# EAGLE board TramontaEmanueleCircuito (EAGLE 9.7.0)

Size 159.7 x 119.8 mm. Coordinates in mm from the lower left corner, seen from the top.
Outline: 0,0 159.7,0 159.7,119.8 0,119.8 0,0
Copper layers (1*16): Top 0.035mm / dielectric 1.5mm / Bottom 0.035mm
Design rules "default": minimum track width 6mil, minimum drill 0.35mm, track to track 6mil, track to pad 6mil, pad to pad 6mil, via to via 6mil, smd to smd 6mil, copper to edge 40mil, drill to drill 6mil, minimum pad ring 10mil, minimum via ring 8mil, stop-mask expansion 4mil, vias tented up to drill 0mil, thermal gap 10mil

## Footprints (pad centres in the part's own frame; a part is rotated, then mirrored left to right if it is on the bottom)
LEDRD254W60D565H860B = drill 0.981 pad 1.581: 1 -1.27,0; 2 1.27,0
RESAD1016W63L850D250B = drill 0.83 pad 1.43: 1 -5.08,0; 2 5.08,0
SWITCH-SPDT-PTH-8.5X3.7MM = drill 1.016 pad 1.88: 1 -2.54,0; 2 0,0; 3 2.54,0
ARDUINO-UNO-R3-SHIELD = drill 1.016 pad 1.88: 3.3V 24.13,-2.54; 5V 24.13,0; A0 24.13,12.7; A1 24.13,15.24; A2 24.13,17.78; A3 24.13,20.32; A4 24.13,22.86; A5 24.13,25.4; AREF -24.13,-13.97; D2 -24.13,20.32; D3 -24.13,17.78; D4 -24.13,15.24; D5 -24.13,12.7; D6 -24.13,10.16; D7 -24.13,7.62; D8 -24.13,3.81; D9 -24.13,1.27; D10 -24.13,-1.27; D11 -24.13,-3.81; D12 -24.13,-6.35; D13 -24.13,-8.89; GND@0 24.13,2.54; GND@1 24.13,5.08; GND@2 -24.13,-11.43; IOREF 24.13,-7.62; NC 24.13,-10.16; RES 24.13,-5.08; RX -24.13,25.4; SCL -24.13,-19.05; SDA -24.13,-16.51; TX -24.13,22.86; VIN 24.13,7.62
DIP762W53P254L1969H508Q14B = drill 0.743 pad 1.343: 1 -3.81,7.62; 2 -3.81,5.08; 3 -3.81,2.54; 4 -3.81,0; 5 -3.81,-2.54; 6 -3.81,-5.08; 7 -3.81,-7.62; 8 3.81,-7.62; 9 3.81,-5.08; 10 3.81,-2.54; 11 3.81,0; 12 3.81,2.54; 13 3.81,5.08; 14 3.81,7.62

## Placement (x,y rotation side)
DA  RED  [LEDRD254W60D565H860B]  104.22,24.84 0 top
DB  RED  [LEDRD254W60D565H860B]  125.31,24.26 0 top
DS1  RED  [LEDRD254W60D565H860B]  109.68,75.71 0 top
DS2  RED  [LEDRD254W60D565H860B]  95.33,75.74 0 top
DZ  RED  [LEDRD254W60D565H860B]  93.92,96.77 0 top
R2  1k  [RESAD1016W63L850D250B]  140.67,49.39 90 top
R4  1k  [RESAD1016W63L850D250B]  138.13,49.39 90 top
R5  1k  [RESAD1016W63L850D250B]  145.75,49.39 90 top
R6  1k  [RESAD1016W63L850D250B]  143.21,49.39 90 top
R7  1k  [RESAD1016W63L850D250B]  150.83,13.83 90 top
R8  1k  [RESAD1016W63L850D250B]  153.37,13.83 90 top
S2  TOGGLE  [SWITCH-SPDT-PTH-8.5X3.7MM]  96.54,29.45 0 top
S3  TOGGLE  [SWITCH-SPDT-PTH-8.5X3.7MM]  116.07,29.09 0 top
U1  ARDUINO-UNO-R3-SHIELD  [ARDUINO-UNO-R3-SHIELD]  47.88,29.84 270 top
U3  74HC08_PDIP  [DIP762W53P254L1969H508Q14B]  70.31,112.14 90 top

## Library data of the parts
DA DB DS1 DS2 DZ = Tinkercad; CATEGORY: Opto-Electronic; SUB-CATEGORY: LED; VALUE: LED_RED
R2 R4-R8 S2 S3 U1 U3 = Tinkercad

## Nets
DA_C: DA.2 R7.2
DB_C: DB.2 R8.2
DS1_C: DS1.2 R2.1
DS2_C: DS2.2 R4.1
DZ_C: DZ.2 R6.1
U1_5V: S2.3 S3.3 U1.5V U3.14
U1_D2: DA.1 S2.2 U1.D2
U1_D3: DB.1 S3.2 U1.D3
U1_D4: DS2.1 U1.D4 U3.2
U1_D5: DS1.1 U1.D5 U3.1
U1_GND: R2.2 R4.2 R5.2 R6.2 R7.1 R8.1 S2.1 S3.1 U1.GND@0 U1.GND@1 U1.GND@2
U3_1Y: DZ.1 U3.3
U3_GND: R5.1 U3.7

## Tracks (layer width: path | path; a pad name or v marks a point on that pad's centre or on a via)
DA_C  (1 unrouted)
DB_C  (1 unrouted)
DS1_C  (1 unrouted)
DS2_C  (1 unrouted)
DZ_C  (1 unrouted)
U1_5V  (3 unrouted)
U1_D2  (2 unrouted)
U1_D3  (2 unrouted)
U1_D4  (2 unrouted)
U1_D5  (2 unrouted)
U1_GND  (10 unrouted)
U3_1Y  (1 unrouted)
U3_GND  (1 unrouted)